# Altium PCB Controller_driver.PcbDoc
Units mil, origin at the board's own origin, x right, y up, seen from the top; angles counter-clockwise.
Board outline 1105 x 1800 mil, 2 copper layers (Top Layer, Bottom Layer); 55 components, 44 nets, 178 pads, 68 vias.
Unrouted connection lines stored in the file: 3.
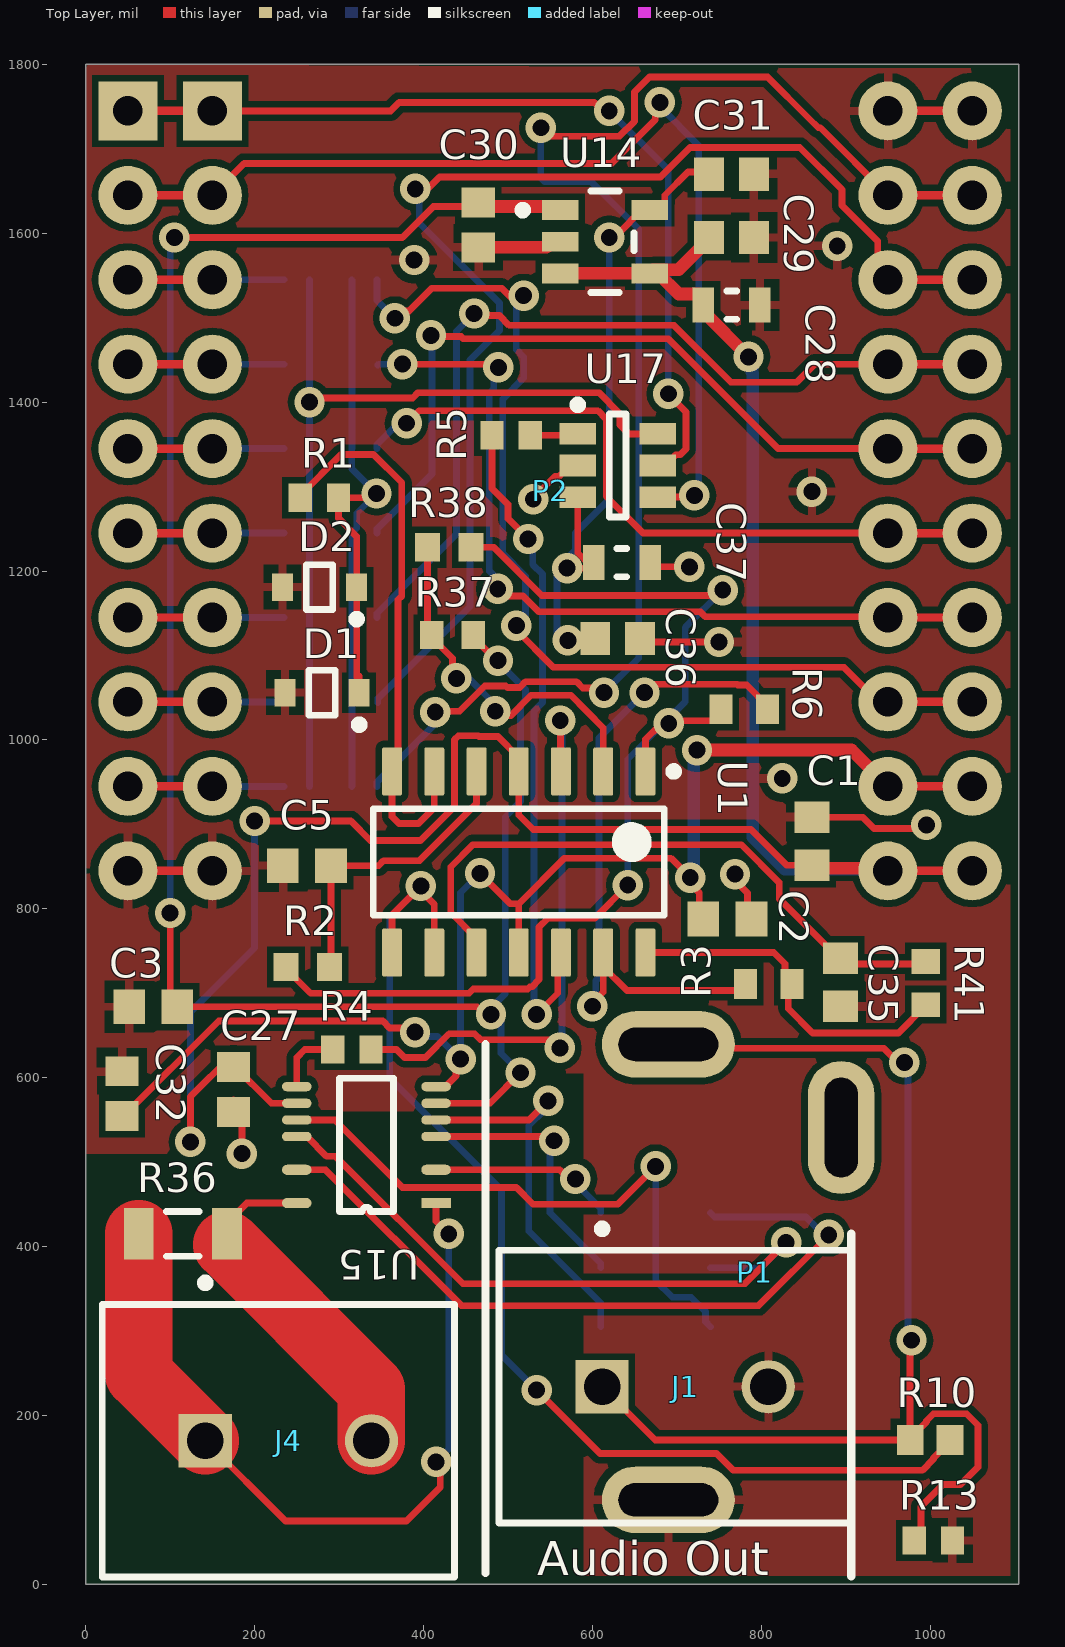
[diagram p0: Top Layer view]
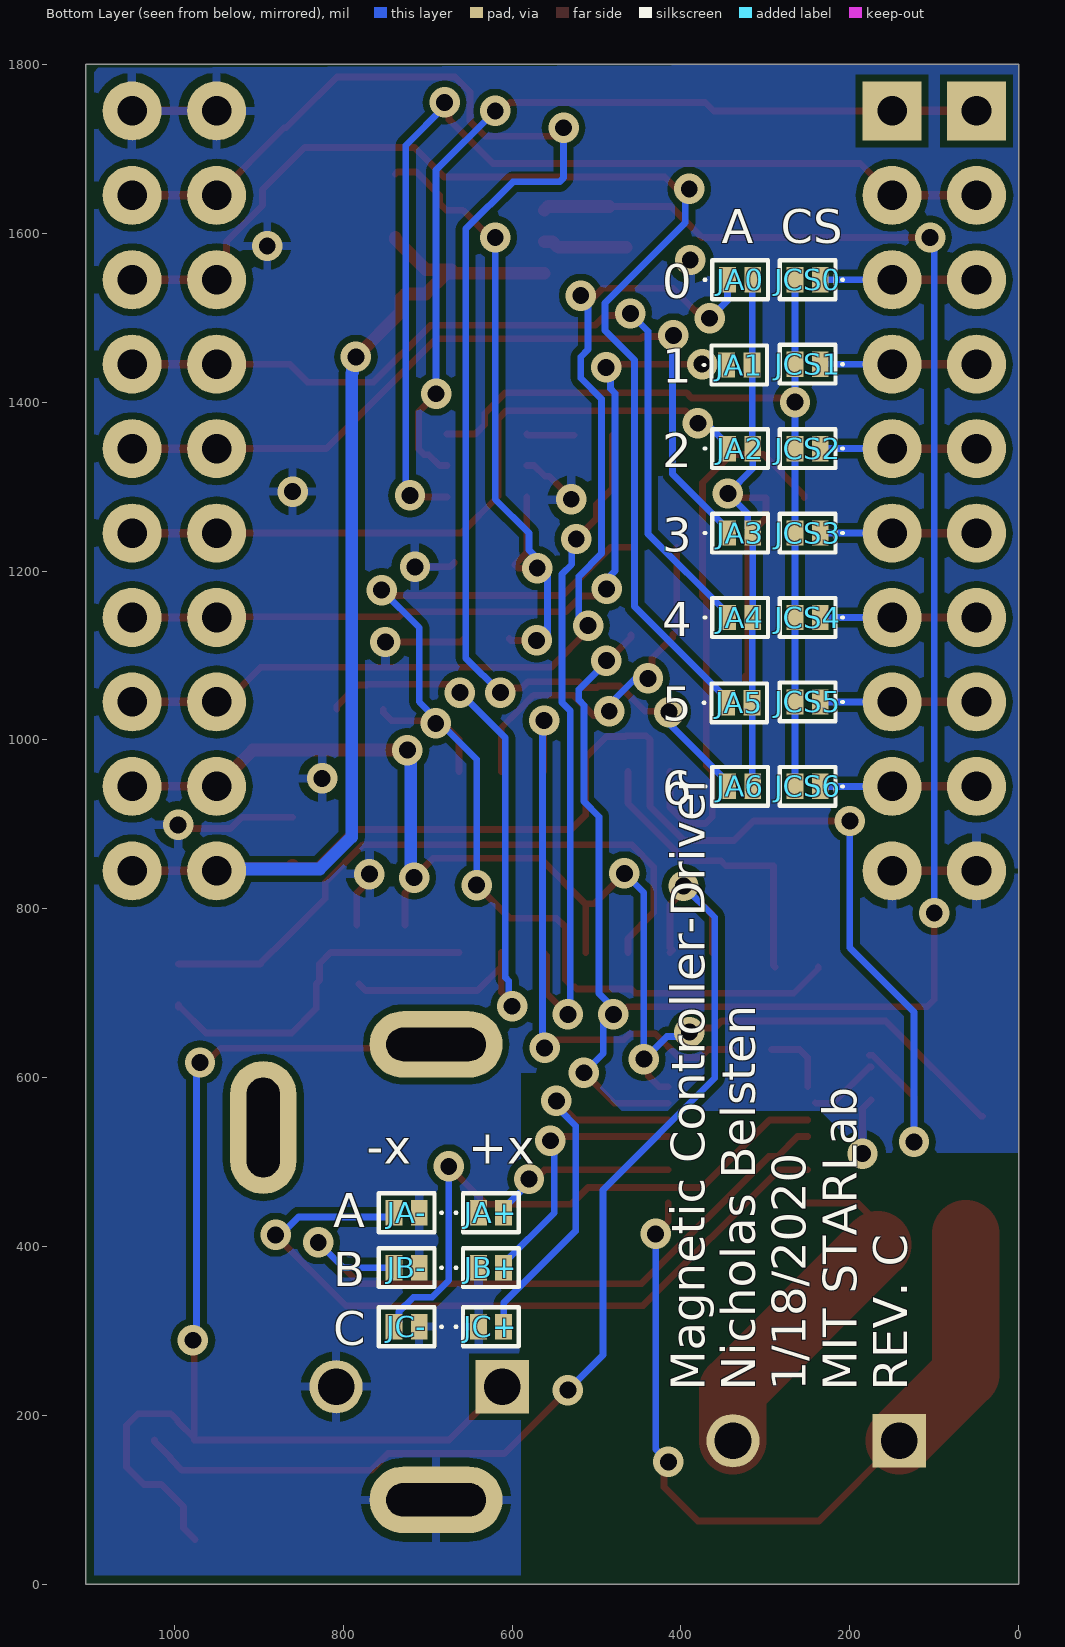
[diagram p1: Bottom Layer view, seen from below]

## Layer stack, top to bottom
Top Solder: solder mask 0.4, Solder Resist, Dk 3.5
Top Layer: signal copper 1.4
Dielectric 1: dielectric 12.6, FR-4, Dk 4.8
Bottom Layer: signal copper 1.4
Bottom Solder: solder mask 0.4, Solder Resist, Dk 3.5

## Board outline
0,0 1105,0 1105,1800 0,1800

## Design rules (kind name [scope] priority, off if disabled: settings)
Clearance [All] p1: gap=8 ignorepadtopadclearanceinfootprint=FALSE
ComponentClearance [All] p1: gap=0 collisioncheckmode=3 verticalgap=0 showdistances=FALSE
HoleSize [All] p1: absolutevalues=TRUE maxlimit=300 minlimit=10 maxpercent=80.000 minpercent=20.000
MinimumSolderMaskSliver [All] p1: minsoldermaskwidth=4
PolygonConnect [All] p1: connectstyle=Relief reliefconductorwidth=10 reliefentries=4 polygonreliefangle="90 Angle" airgapwidth=10
RoutingTopology [All] p1: topology=Daisy_Balanced
RoutingVias [All] p1: holewidth=20 width=36 viastyle="Through Hole" minholewidth=14 minwidth=30 maxholewidth=30 maxwidth=70
SilkToSilkClearance [All] p1: silktosilkclearance=5
SilkToSolderMaskClearance [IsPad] p1: minsilkscreentomaskgap=4 clearancetoexposedcopper=TRUE
SolderMaskExpansion [All] p1: expansion=3 istentingtop=FALSE
Width [All] p1: maxlimit=100 minlimit=8 preferedwidth=8
24 further rules are at their usual default settings.

## Components (designator, comment, footprint, x,y, rotation, side; value= is the part's Value field where it differs from the comment)
C1 "0.47 uF" CAPC1608X90X35ML10T15 860,880 r270 top
C2 "0.47 uF" CAPC1608X90X35ML10T15 760,788 r180 top
C3 "0.47 uF" CAPC1608X90X35ML10T15 80,684 r0 top
C5 "0.47 uF" CAPC1608X90X35ML10T15 262,851 r0 top
C27 "0.1 uF" CAPC1608X87X35NL15T15 175,586 r90 top
C28 "10 uF" CAPC1608X90X20ML10 765,1515 r180 top
C29 "0.1 uF" CAPC1608X87X35NL15T15 765,1595 r180 top
C30 "0.1 uF" CAPC1608X87X35NL15T15 465,1610 r90 top
C31 "0.1 uF" CAPC1608X87X35NL15T15 765,1670 r180 top
C32 "0.1 uF" CAPC1608X87X35NL15T15 43,581 r270 top
C35 "0.47 uF" CAPC1608X90X35ML10T15 894,713 r90 top
C36 "0.1 uF" CAPC1608X87X35NL15T15 630,1120 r180 top
C37 "10µF" CAPC1608X90X20ML10 635,1210 r180 top
D1 "BAT54HT1G" ONSC-SOD-323-2-477-02_V 280,1056 r180 top
D2 "MM3Z3V3T1G" ONSC-SOD-323-2-477-02_V 277,1181 r180 top
J1 "282836-2" TECO-282836-2_V 710,234 r0 top
J4 "282836-2" TECO-282836-2_V 240,170 r0 top
JA0 "*" solder_jumper 295,1545 r90 bottom
JA1 "*" solder_jumper 296,1444 r90 bottom
JA2 "*" solder_jumper 295,1345 r90 bottom
JA3 "*" solder_jumper 295,1245 r90 bottom
JA4 "*" solder_jumper 295,1145 r90 bottom
JA5 "*" solder_jumper 296,1044 r90 bottom
JA6 "*" solder_jumper 295,945 r90 bottom
JA+ "*" solder_jumper 590,440 r90 bottom
JA- "*" solder_jumper 760,440 r270 bottom
JB+ "*" solder_jumper 590,375 r90 bottom
JB- "*" solder_jumper 760,375 r270 bottom
JC+ "*" solder_jumper 590,305 r90 bottom
JC- "*" solder_jumper 760,305 r270 bottom
JCS0 "*" solder_jumper 285,1545 r270 bottom
JCS1 "*" solder_jumper 285,1445 r270 bottom
JCS2 "*" solder_jumper 285,1345 r270 bottom
JCS3 "*" solder_jumper 285,1245 r270 bottom
JCS4 "*" solder_jumper 285,1145 r270 bottom
JCS5 "*" solder_jumper 285,1045 r270 bottom
JCS6 "*" solder_jumper 285,945 r270 bottom
P1 "audio_jack" MJ-3536NG 690,100 r90 top
P2 "dp20" dp20-900-double 50,1745 r0 top
R1 "220" RESC1609X50X30LL10T20 276.76,1286.71 r0 top
R2 "10KOhm" RESC1609X55X30LL15T15 263,731 r0 top
R3 "100 kΩ" RESC1608X55X25NL10T15 809,711 r180 top
R4 "220" RESC1609X50X30LL10T20 315.32,633.45 r0 top
R5 "220" RESC1609X50X30LL10T20 503.94,1360.75 r180 top
R6 "100Ohm" RESC1608X55X25NL10T15 780.04,1036.32 r0 top
R10 "1 kΩ" RESC1608X55X30LL20T20 1000,171 r180 top
R13 "220" RESC1609X50X30LL10T20 1004,52 r180 top
R36 "0.01 Ω" RESC3216X70X50LL05T20 115,415 r180 top
R37 "1 kΩ" RESC1608X55X30LL15T15 434.48,1124.31 r0 top
R38 "10KOhm" RESC1609X55X30LL15T15 430.48,1228.31 r0 top
R41 "10KOhm" RESC1609X55X30LL15T15 995,712 r90 top
U1 "TLV274IDR" D0014A_N 512.86,855.42 r270 top
U14 "REF2033AIDDCR" FP-DDC0005A-MFG 615,1590 r0 top
U15 "LT6375" SOP16-12 415,451.5 r180 top
U17 "DAC121S101CIMK/NOPB" MK06A_N 630,1325 r0 top

## Footprints (in the part's own frame and the unit in brackets; to place one, negate y for a bottom-side part, rotate by r counter-clockwise, add the part's x,y. Pads: shape width x height; smd on the part's side, far side on the other; paste and mask are expansions set on the pad)
CAPC1608X87X35NL15T15 [mm] "Chip Capacitor, 2-Leads, Body 1.60x0.80mm, IPC Medium Density"
  rect 0.9x1 smd: 1(-0.675,0) 2(0.675,0)
  body extent -0.87,-0.48 0.87,0.47, height 0.87
CAPC1608X90X20ML10 [mm] "Chip Capacitor, 2-Leads, Body 1.70x0.90mm, IPC Low Density"
  rect 0.65x1.05 smd: 1(-0.85,0) 2(0.85,0)
  silkscreen extent -0.15,-0.43 0.15,0.43, body extent -0.85,-0.45 0.85,0.45, height 0.9
CAPC1608X90X35ML10T15 [mm] "Chip Capacitor, 2-Leads, Body 1.60x0.80mm, IPC Low Density"
  rect 0.95x1.05 smd: 1(-0.725,0) 2(0.725,0)
  body extent -0.85,-0.45 0.85,0.45, height 0.9
D0014A_N [mm] "SOIC, 14-Leads, Body 8.75x4mm, Pitch 1.27mm, IPC Medium Density"
  rrect17% 1.45x0.6 smd: 1(-2.725,3.81) 2(-2.725,2.54) 3(-2.725,1.27) 4(-2.725,0) 5(-2.725,-1.27) 6(-2.725,-2.54) 7(-2.725,-3.81) 8(2.725,-3.81) 9(2.725,-2.54) 10(2.725,-1.27) 11(2.725,0) 12(2.725,1.27) 13(2.725,2.54) 14(2.725,3.81)
  silkscreen extent -2.85,-4.38 1.6,4.79, body extent -3.02,-4.32 3.02,4.32, height 1.59
dp20-900-double [mil]
  rect 70x70 hole 35: 1(0,0) 1(100,0)
  round 70 hole 35: 2(0,-100) 2(100,-100) 3(0,-200) 3(100,-200) 4(0,-300) 4(100,-300) 5(0,-400) 5(100,-400) 6(0,-500) 6(100,-500) 7(0,-600) 7(100,-600) 8(0,-700) 8(100,-700) 9(0,-800) 9(100,-800) 10(0,-900) 10(100,-900) 11(900,-900) 11(1000,-900) 12(900,-800) 12(1000,-800) 13(900,-700) 13(1000,-700) 14(900,-600) 14(1000,-600) 15(900,-500) 15(1000,-500) 16(900,-400) 16(1000,-400) 17(900,-300) 17(1000,-300) 18(900,-200) 18(1000,-200) 19(900,-100) 19(1000,-100) 20(900,0) 20(1000,0)
  Top Layer lines w10: 0,-900 100,-900 ; 0,-800 100,-800 ; 0,-700 100,-700 ; 0,-600 100,-600 ; 0,-500 100,-500 ; 0,-400 100,-400 ; 0,-300 100,-300 ; 0,-200 100,-200 ; 0,-100 100,-100 ; 0,0 100,0 ; 900,-900 908,-900 1000,-900 ; 900,-800 1000,-800 ; 900,-700 1000,-700 ; 900,-600 1000,-600 ; 900,-500 1000,-500 ; 900,-400 1000,-400 ; 900,-300 1000,-300 ; 900,-200 1000,-200 ; 900,-100 1000,-100 ; 900,0 1000,0
FP-DDC0005A-MFG [mm]
  rect 1.1x0.6 smd paste+0 mask+0: 1(-1.35,0.95) 2(-1.35,0) 3(-1.35,-0.95) 4(1.35,-0.95) 5(1.35,0.95)
  silkscreen extent -2.6,-1.53 0.87,1.53, body extent -2,-1.63 2,1.63, height 0.25
MJ-3536NG [mm]
  oval 2x4 hole 1 slot 3 at 90 deg: 1(0,0) 2(13.7,0)
  oval 4x2 hole 1 slot 3 at 0 deg: 3(11.2,-5.2)
  silkscreen extent -2.3,-5.5 13.7,5.5
MK06A_N [mm] "SOT23, 6-Leads, Body 3.0x1.7mm, Pitch 0.95mm, Lead Span 2.9mm, IPC Medium Density"
  rect 1.1x0.65 smd: 1(-1.2,0.95) 2(-1.2,0) 3(-1.2,-0.95) 4(1.2,-0.95) 5(1.2,0) 6(1.2,0.95)
  silkscreen extent -1.32,-1.55 0.25,1.95, body extent -0.87,-1.53 0.87,1.54, height 1
ONSC-SOD-323-2-477-02_V [mm] "SOD, 2-Leads, Body 1.7x1.25mm"
  rect 0.63x0.83 smd: 1(-1.115,0) 2(1.115,0)
  silkscreen extent -1.24,-0.67 0.4,1.09, body extent -0.85,-0.63 0.85,0.63, height 1.06
RESC1608X55X25NL10T15 [mm] "Chip Resistor, 2-Leads, Body 1.60x0.80mm, IPC Medium Density"
  rect 0.7x0.9 smd: 1(-0.7,0) 2(0.7,0)
  body extent -0.85,-0.45 0.85,0.45, height 0.55
RESC1608X55X30LL15T15 [mm] "Chip Resistor, 2-Leads, Body 1.60x0.80mm, IPC High Density"
  rect 0.7x0.85 smd: 1(-0.625,0) 2(0.625,0)
  body extent -0.87,-0.48 0.87,0.48, height 0.55
RESC1608X55X30LL20T20 [mm] "Chip Resistor, 2-Leads, Body 1.60x0.80mm, IPC High Density"
  rect 0.8x0.9 smd: 1(-0.6,0) 2(0.6,0)
  body extent -0.9,-0.5 0.9,0.5, height 0.55
RESC1609X50X30LL10T20 [mm] "Chip Resistor, 2-Leads, Body 1.55x0.85mm, IPC High Density"
  rect 0.7x0.85 smd: 1(-0.575,0) 2(0.575,0)
  body extent -0.82,-0.48 0.82,0.48, height 0.5
RESC1609X55X30LL15T15 [mm] "Chip Resistor, 2-Leads, Body 1.75x0.95mm, IPC High Density"
  rect 0.75x0.85 smd: 1(-0.65,0) 2(0.65,0)
  body extent -0.87,-0.48 0.87,0.48, height 0.55
RESC3216X70X50LL05T20 [mm] "Chip Resistor, 2-Leads, Body 3.20x1.60mm, IPC High Density"
  rect 0.9x1.55 smd: 1(-1.325,0) 2(1.325,0)
  silkscreen extent -0.5,-0.67 0.5,0.67, body extent -1.63,-0.82 1.62,0.82, height 0.7
solder_jumper [mil]
  rect 30x20 smd: 0(0,20) 1(0,50)
  silkscreen extent -23,2 23,77
SOP16-12 [mil]
  rect 35x12 smd: 1(0,0)
  oval 35x12 smd: 3(0,-39.4) 14(165,-39.4) 16(165,0)
  oval 35x11 smd mask+2: 5(0,-78.8) 6(0,-98.5) 7(0,-118.2) 8(0,-137.9) 9(165,-137.9) 10(165,-118.2) 11(165,-98.5) 12(165,-78.8)
  silkscreen extent 50,-148 115,10
TECO-282836-2_V [mm] "Female Header, Pitch 5mm, 1 x 2 Position, Height 10mm"
  rect 1.6x1.6 hole 1.1: 1(-2.5,0)
  round 1.6 hole 1.1: 2(2.5,0)
  silkscreen extent -5.6,-4.1 5,4.87, body extent -5.6,-4.1 5,4.1, height 10

## Part data
C1 C2 C3 C5 C35: library part CMP-2006-02860-1, Manufacturer=Murata, Part Number=GRM188R71C474KA88D
C27 C29 C30 C31 C32 C36: library part CMP-2006-03300-1, Manufacturer=Kemet, Part Number=C0603X104K5RACTU, Capacitance="0.1 uF"
C28: library part CMP-2000-04979-1, "Chip Capacitor, 10 uF, +/- 10%, 10 V, -55 to 85 degC, 0603 (1608 Metric), RoHS, Tape and Reel", Capacitance=10µF, Manufacturer=TDK, Operating Temperature=-55degC~85degC, Package / Case=0603(1608Metric), Package Description="2-Pin Surface Mount Device, Body 1.6 x 0.8 mm", Package Reference=603, PCN Part Number=MLCCPartNumberChange30/Nov/2012, Ratings=-, Standard Package=1, Temperature Coefficient=X5R, Tolerance=±10%, Voltage - Rated=10V, Applications=GeneralPurpose, Category=Capacitors, Datasheet URL=http://download.siliconexpert.com/pdfs/2015/4/21/15/54/45/779/tdk_/manual/37024850441143360mlcc_commercial_general_en.pdf, Datasheet Version=Mar-15, Design Resources=20WNon-IsolatedBuckLEDDriverUsingPLLNK460KG, Family=CeramicCapacitors, Features=-, Height - Seated (Max)=-, Kits=445-9003-KIT-ND-KITCAPCERHICAPMLCCSMD, Lead Spacing=-, Lead Style=-, Manufacturer URL=http://www.tdk.com/, Mounting Type=SurfaceMount,MLCC, Online Catalog=CSeries,GeneralPurpose, Other Names=445-7486-1, Packaging=CutTape(CT), Product Training Modules=CSeriesGeneralApplicationsSEAT,CCV,andTVCLDesignToolsGuidetoReplacinganElectrolyticCapacitorwithanMLCC, RoHS Information=RoHSCertificate-MLCC, Series=C, Size / Dimension="0.063\"Lx0.031\"W(1.60mmx0.80mm)", Thickness (Max)="0.035\"(0.90mm)"
C37: library part CMP-2000-04979-1, "Chip Capacitor, 10 uF, +/- 10%, 10 V, -55 to 85 degC, 0603 (1608 Metric), RoHS, Tape and Reel", Manufacturer=TDK, Operating Temperature=-55degC~85degC, Package / Case=0603(1608Metric), Package Description="2-Pin Surface Mount Device, Body 1.6 x 0.8 mm", Package Reference=603, PCN Part Number=MLCCPartNumberChange30/Nov/2012, Ratings=-, Standard Package=1, Temperature Coefficient=X5R, Tolerance=±10%, Voltage - Rated=10V, Applications=GeneralPurpose, Capacitance=10µF, Category=Capacitors, Datasheet URL=http://download.siliconexpert.com/pdfs/2015/4/21/15/54/45/779/tdk_/manual/37024850441143360mlcc_commercial_general_en.pdf, Datasheet Version=Mar-15, Design Resources=20WNon-IsolatedBuckLEDDriverUsingPLLNK460KG, Family=CeramicCapacitors, Features=-, Height - Seated (Max)=-, Kits=445-9003-KIT-ND-KITCAPCERHICAPMLCCSMD, Lead Spacing=-, Lead Style=-, Manufacturer URL=http://www.tdk.com/, Mounting Type=SurfaceMount,MLCC, Online Catalog=CSeries,GeneralPurpose, Other Names=445-7486-1, Packaging=CutTape(CT), Product Training Modules=CSeriesGeneralApplicationsSEAT,CCV,andTVCLDesignToolsGuidetoReplacinganElectrolyticCapacitorwithanMLCC, RoHS Information=RoHSCertificate-MLCC, Series=C, Size / Dimension="0.063\"Lx0.031\"W(1.60mmx0.80mm)", Thickness (Max)="0.035\"(0.90mm)"
D1: library part CMP-1055-00462-1, "Schottky Barrier Diode, 2-Pin SOD-323, Pb-Free, Tape and Reel", Manufacturer="On Semiconductor", ComponentLink1Description="Manufacturer URL", ComponentLink1URL=http://www.onsemi.com/, ComponentLink2Description=Datasheet, ComponentLink2URL=http://www.onsemi.cn/pub_link/Collateral/BAT54HT1-D.PDF, ComponentLink3Description="Package Specification", ComponentLink3URL=http://www.onsemi.com/pub_link/Collateral/477-02.PDF.1, Configuration=Single, DatasheetVersion="Rev. 6", IFSM Max (A)=0.6, Mounting Technology="Surface Mount", PackageDescription="2-Pin SOD, Body 1.7 x 1.25 mm", PackageReference=SOD-323-2-477-02, PackageVersion="Rev. H, 03/2007", Packing="Tape and Reel", PartNumber=BAT54HT1G, RoHS=TRUE, trr Max (ns)=5
D2: library part CMP-1060-00672-1, "Zener Voltage Regulator, 300 mW, 2-Pin SOD-323, Pb-Free, Tape and Reel", Manufacturer="On Semiconductor", ComponentLink1Description="Manufacturer URL", ComponentLink1URL=http://www.onsemi.com/, ComponentLink2Description=Datasheet, ComponentLink2URL=http://www.onsemi.cn/pub_link/Collateral/MM3Z2V4T1-D.PDF, ComponentLink3Description="Package Specification", ComponentLink3URL=http://www.onsemi.com/pub_link/Collateral/477-02.PDF.1, DatasheetVersion="Rev. 9", Mounting Technology="Surface Mount", P Max (W)=0.3, PackageDescription="2-Pin SOD, Body 1.7 x 1.25 mm", PackageReference=SOD-323-2-477-02, PackageVersion="Rev. H, 03/2007", Packing="Tape and Reel", PartNumber=MM3Z3V3T1G, RoHS=Pb-Free, VZ Typ (V)=3.3
J1 J4: library part CMP-1684-00017-1, "Female Header, Pitch 5 mm, 1 x 2 Position, Height 10 mm, Tail Length 3.5 mm, Rohs, Bulk", Color=Green, Current=13.5A, Manufacturer="TE Connectivity", Package Description="Female Header, Pitch 5 mm, 1 x 2 Position, Height 10 mm, Tail Length 3.5 mm", Package Reference=THD, Standard Package=300, Voltage=300V, 3D Model=282836-2.pdf, Category=Connectors,Interconnects, Clamp Material - Plating=Brass-NickelPlated, Contact Material - Plating=Brass-TinPlated, Datasheet URL=http://www.te.com.cn/commerce/DocumentDelivery/DDEController?Action=showdoc&DocId=Catalog+Section%7F1308389_EUROSTYLE_TERMINAL_BLOCKS%7F0607%7Fpdf%7FEnglish%7FENG_CS_1308389_EUROSTYLE_TERMINAL_BLOCKS_0607.pdf%7F282836-2, Dynamic Catalog=BuchananSeries, Family=TerminalBlocks-WiretoBoard, Featured Product=EurostyleTerminalBlockConnectors, Features=Interlocking(Side), Housing Material=Polyamide(PA66),Nylon6/6, Manufacturer URL=http://www.te.com, Mating Orientation=HorizontalwithBoard, Mounting Type=ThroughHole, Number of Levels=1, Other Names="5ULV-02B / A98076", Packaging=Bulk, Pitch="0.197\"(5.00mm)", Positions Per Level=2, Product Training Modules=Wire-to-BoardEurostyleTerminalBlocks, RoHS Information=282836-2StatementofCompliance, Screw Material - Plating=Brass-NickelPlated, Screw Thread=M3, Series=Buchanan, Torque - Screw=0.68Nm(6Lb-In), Wire Gauge=16-30AWG, Wire Termination=Screw-RisingCageClamp
JA0 JA1 JA2 JA3 JA4 JA5 JA6 JA+ JA- JB+ JB- JC+ JC- JCS0 JCS1 JCS2 JCS3 JCS4 JCS5 JCS6: library part solder_jumper
R1 R4 R5 R13: library part CMP-2000-03085-1, Manufacturer="Vishay Dale", Part Number=CRCW0603220RFKEA, Resistance=220
R2 R38 R41: library part CMP-2000-07452-1, "Chip Resistor, 10 KOhm, +/- 1%, 0.1 W, -55 to 155 degC, 0603 (1608 Metric), RoHS, Tape and Reel", Case Code (Imperial)=0603, Case Code (Metric)=1608, Manufacturer=Panasonic, Max Operating Temperature=155degC, Max Power Dissipation=100mW, Min Operating Temperature=-55degC, Package Description="2-Pin Surface Mount Device, Body 1.6 x 0.85 mm", Package Quantity=1, Package Reference=603, Temperature Coefficient=100ppm\/degreesC, Tolerance=1%, Voltage Rating=75V, Case\/Package=0603, Composition=ThickFilm, Contact Plating=Tin, Datasheet URL=https://industrial.panasonic.com/cdbs/www-data/pdf/RDA0000/AOA0000C304.pdf, Datasheet Version=02/2017, Depth=0.8mm, Height=0.45mm, Lead Free=LeadFree, Length=1.6mm, Manufacturer URL=http://www.panasonic.com/, Military Standard=Not, Mount=SurfaceMount, Mounting Technology=SurfaceMount, Number of Pins=2, Number of Terminations=2, Packaging=TapeandReel, Power Rating=100mW, Radiation Hardening=No, REACH SVHC=NoSVHC, Resistance=10KOhm, RoHSCompliant=true, Termination=SMD/SMT, Voltage Rating (DC)=75V, Width=0.031inch
R3: library part CMP-2000-04301-1, Manufacturer=Yageo, Part Number=RC0603JR-10100KL, Resistance="100 kΩ"
R6: library part CMP-2100-03663-1, "Chip Resistor, 100 Ohm, +/- 1%, 0.1 W, -55 to 155 degC, 0603 (1608 Metric), RoHS, Tape and Reel", Case Code (Imperial)=0603, Case Code (Metric)=1608, Manufacturer=Yageo, Max Operating Temperature=155degC, Min Operating Temperature=-55degC, Package Description="2-Pin Surface Mount Device, Body 1.6 x 0.8 mm", Power Rating=100mW, Temperature Coefficient=100ppm/degreesC, Tolerance=1%, Voltage Rating=50V, Case/Package=0603, Composition=ThickFilm, Datasheet URL=http://www.yageo.com/NewPortal/yageodocoutput?fileName=/pdf/R-Chip/PYu-RC_Group_51_RoHS_L_5.pdf, Datasheet Version="Rev. 5, 10/2016", Depth=0.8mm, Height=0.45mm, Lead Free=LeadFree, Length=1.6mm, Manufacturer URL=http://www.yageo.com/, Military Standard=Not, Number of Pins=2, Package Reference=0603, Packaging=TapeandReel, REACH SVHC=Unknown, Resistance=100Ohm, RoHSCompliant=true, Termination=SMD/SMT, Voltage Rating (DC)=50V, Width=0.8mm
R10: library part CMP-2000-00873-1, Manufacturer=Panasonic, Part Number=ERA3AEB102V, Resistance="1 kΩ"
R36: library part CMP-2003-00764-1, Manufacturer=Panasonic, Part Number=ERJ8BWFR010V, Resistance="0.01 Ω"
R37: library part CMP-2000-00180-1, Manufacturer=Panasonic, Part Number=ERJ-3EKF1001V, Resistance="1 kΩ"
U1: library part CMP-0272-02760-3, "550 uA/Ch, 3 MHz, Rail-to-Rail Output Operational Amplifier, 2.7 to 16 V, -40 to 125 degC, 14-pin SOIC (D14), Green (RoHS & no Sb/Br)", Manufacturer="Texas Instruments", Rating=Catalog, Total Supply Voltage(Max)(+5V is 5, +/-5V is 10)=16, Total Supply Voltage(Min)(+5V is 5, +/-5V is 10)=2.7, CMRR(Min)(dB)=69, Code_JEDEC=MS-012, ComponentLink1Description="Manufacturer URL", ComponentLink1URL=http://www.ti.com/, ComponentLink2Description=Datasheet, ComponentLink2URL=http://www.ti.com/lit/ds/symlink/tlv274.pdf, ComponentLink3Description="Package Specification", ComponentLink3URL=http://www.ti.com/lit/ml/mpds177g/mpds177g.pdf, DatasheetVersion=SLOS351D, Eco-Plan="Green (RoHS & no Sb/Br)", GBW(Typ)(MHz)=3, IIB(Max)(pA)=60, Iq per channel(Max)(mA)=0.55, Mounting Technology="Surface Mount", Number of Channels=4, Offset Drift(Typ)(uV/C)=2, PackageDescription="14-Pin Plastic Small Outline, Body 8.65 x 3.9 mm, Pitch 1.27 mm", PackageReference=D0014A, PackageVersion="4040047-5/M, 06/2011", Packing="LARGE T&R", PartNumber=TLV274IDR, Slew Rate(Typ)(V/us)=2.4, Sub Family="Low Supply Voltage Amplifier (<=2.7V), Precision Amplifier", Vio (25C)(Max)(mV)=5
U14: library part CMP-04916-000008-1, "IC VREF SERIES 1.65V/3.3V 5SOT", Manufacturer="Texas Instruments", Max Junction Temp=+150°C, Max Supply Voltage=5.5V, Min Supply Voltage=3.32V, Nominal Supply Current=360uA, Output Current=20mA, Output Voltage=1.65/3.3V, Package=DDC0005A, Temperature="-40°C to +125°C", Temperature Range High=+125°C, Temperature Range Low=-40°C, Automotive=No, Category=IC, ComponentLink2Description=Datasheet, ComponentLink2URL=http://www.ti.com/lit/ds/symlink/ref2033.pdf, Device Class L1="Integrated Circuits (ICs)", Device Class L2="Power Management ICs", Device Class L3="Voltage References", Digikey Description="IC VREF SERIES 1.65V/3.3V 5SOT", Height=1.1mm, Lead Free=Yes, Manufacturer Part Number=REF2033AIDDCR, Number Of Outputs=2, Octopart=https://octopart.com/ref2033aiddcr-texas+instruments-46921199, Output Type=Fixed, Reference Type=Series, RoHS=TRUE, Standoff Height=0mm
U17: library part CMP-0061-00064-2, "12-Bit Micro Power, RRO Digital-to-Analog Converter, 6-pin Tiny SOT23, Pb-Free", Manufacturer="National Semiconductor", PackageTopMarking=X61C*XTT, PowerWise=Y, Code_IPC=SOT26A-6, Code_JEDEC=MO-193-AA, ComponentLink1Description="DAC121S101 Datasheet", ComponentLink1URL=http://www.national.com/ds/DA/DAC121S101.pdf, ComponentLink2Description="DAC121S101 Web Page", ComponentLink2URL=http://www.national.com/pf/DA/DAC121S101.html, ComponentLink3Description="MK06A Package Page", ComponentLink3URL=http://www.national.com/packaging/folders/mk06a.html, CompType="D/A Converter", DatasheetVersion=Feb-2010, PackageDescription="Molded TSOT, 2.97 x 1.65 x 0.87mm Body, 6 Lead, 0.95mm Pitch", PackageReference=MK06A, PackageVersion="revE, Nov-2008", PinCount=6, RevisionNote="Component URLs added", RoHS=Y

## Via types
v1: diameter 36, hole 20, Top Layer to Bottom Layer, 68 vias

## Nets (pads, with @x,y where several pads share a name; then routed paths per layer and width w, separated by ;. In a path a pad name is that pad's centre, name@x,y a point inside that pad or via, vN(x,y) a via of type N, cw(c..) or ccw(c..) an arc to the next point about the centre after c; other vN are vias at no path point)
5V: C1.2 C27.2 C28.2 C29.2 P2.11 U1.4 U14.3 U14.4 U15.10 | length 2703.5
  Top Layer w8: v1(124,524) 124,577.54 173.03,626.57 C27.2@176.97,626.57 ; C27.2 176.97,612.57 219.84,569.7 240.33,569.7 U15.10@240.9,570.27 ; v1(200,904) 314,904 337,881 396.63,881 436.67,921.04 436.67,1000.31 441.35,1005 464.68,1005 465.68,1004 488.29,1004 512.86,979.44 U1.4 512.86,911.14 530,894 788,894 830.54,851.46 C1.2
  Top Layer w15: U14.3 U14.4 ; C29.2 738.43,1593.03 702.3,1556.91 672.46,1556.91 U14.4 ; v1(785,1453.66) 731.54,1507.13 C28.2 731.54,1522.87 726.24,1528.17 702.42,1528.17 677.99,1552.6 U14.4 ; C1.2 863.23,848.23 954.77,848.23 P2.11@958,845
  Bottom Layer w8: v1(124,524) 124,677.79 200,753.79 v1(200,904)
  Bottom Layer w15: v1(785,1453.66) 789.02,1449.64 789.02,1435.36 790,1434.37 790,885 827.89,847.11 947.89,847.11 P2.11@950,845
+REFA: JA+.0 U15.3 | length 221.9
  Top Layer w8: U15.3 561.52,490.9 572.42,480 v1(580,480)
  Bottom Layer w8: v1(580,480) 580,475 610,445 JA+.0
+REFB: JB+.0 U15.5 | length 321.8
  Top Layer w8: U15.5 554.7,530.3 v1(554.7,525.3)
  Bottom Layer w8: v1(554.7,525.3) 550,520.6 550,440 610,380 JB+.0
+REFC: JC+.0 U15.6 | length 440.3
  Top Layer w8: U15.6 525,550 v1@542.6,567.6
  Bottom Layer w8: v1@542.6,567.6 542.6,560.99 524.7,543.08 524.7,418.33 610,333.03 JC+.0
  other v1: 547.6,572.6
-5V: C2.2 C32.2 P2.12 U1.11 U15.8 | length 1559.5
  Top Layer w8: C32.2 44.97,554.43 157.54,667 351.89,667 360,658.89 385.11,658.89 v1(390,654) ; U15.8 426.19,589.4 438.64,601.85 438.64,616.64 v1(444,622) ; v1(467,842) 503.14,805.86 512.86,805.86 ; U1.11 512.86,805.86 ; C2.2@726.76,780.7 726.76,818.67 716,829.42 v1(716,837) 693,860 567,860 512.86,805.86
  Top Layer w15: v1(724,988) 907,988 P2.12@950,945
  Bottom Layer w8: v1(390,654) 395.36,648.64 416.73,648.64 443.37,622 v1(444,622) 444,819 v1(467,842)
  Bottom Layer w15: v1(716,837) 720,841 720,984 v1(724,988)
-REFA: JA-.0 U15.14 | length 882.7
  Top Layer w8: U15.14 284.1,490.9 445,330 797,330 880,413 v1(880,413.9)
  Bottom Layer w8: JA-.0 745,435 853.02,435 874.12,413.9 v1(880,413.9)
-REFB: JB-.0 U15.12 | length 774.6
  Top Layer w8: U15.12 262,530.3 285.4,506.9 295.67,506.9 446.57,356 781,356 829.57,404.57 v1(829.57,405)
  Bottom Layer w8: JB-.0 800,375 829.57,404.57 v1(829.57,405)
-REFC: JC-.0 U15.11 | length 714.9
  Top Layer w8: U15.11 295,550 375,470 510,470 530,450 630,450 v1(675,495)
  Bottom Layer w8: v1(675,495) 675,360 695,340 716.97,340 734,322.97 734,311 JC-.0
A_0: JA0.1 P2.13 | length 1127.3
  Top Layer w8: v1@376.14,1508.43 376.48,1508.1 383.1,1508.1 410,1535 492.42,1535 502.42,1525 517.54,1525 v1(518.7,1526.16) ; v1@508.35,1132.96 508.35,1131.65 554,1086 898,1086 939,1045 P2.13@950,1045
  Bottom Layer w8: JA0.1 345,1520.58 v1(366.14,1499.43) ; v1@507,1134.3 507.96,1135.26 520,1135.26 520,1142.58 521,1143.58 521,1193.74 494,1220.74 494,1404 518.71,1428.71 518.71,1453.71 510,1462.43 510,1521.48 514.01,1521.48 v1(518.7,1526.16)
  other v1: 510,1135.3
A_1: JA1.1 P2.14 | length 893.5
  Top Layer w8: v1(375,1445) 485,1445 v1(488.71,1441.29) ; v1@491,1175.91 496.36,1170.55 517.97,1170.55 536.83,1151.69 728,1151.69 733.69,1146 949,1146 P2.14@950,1145
  Bottom Layer w8: JA1.1 347,1445 v1(375,1445) ; v1(488.71,1441.29) 483.36,1435.93 483.36,1415.98 478,1410.63 478,1199.92 493.19,1184.73 491,1182.53 v1@491,1175.91
  other v1: 488,1178.91
A_2: JA2.1 P2.15 | length 740.3
  Top Layer w8: v1(380,1375) 395,1390 606.58,1390 616.41,1380.17 616.41,1288.59 660,1245 P2.15@950,1245
  Bottom Layer w8: JA2.1 345,1350 364.64,1369.64 374.64,1369.64 v1(380,1375)
A_3: JA3.1 P2.16 | length 858.1
  Top Layer w8: v1(409,1479.17) 410.36,1477.81 444.76,1477.81 447.57,1475 690,1475 820,1345 P2.16@950,1345
  Bottom Layer w8: JA3.1 345,1250 410,1315 410,1478.17 v1(409,1479.17)
A_4: JA4.1 P2.17 | length 940.2
  Top Layer w8: v1(460,1505) 462.43,1502.57 490,1502.57 501.57,1491 696.63,1491 763.97,1423.66 842.23,1423.66 863.57,1445 P2.17@950,1445
  Bottom Layer w8: JA4.1 345,1150 439,1244 439,1484 v1(460,1505)
A_5: JA5.1 P2.18 | length 1387.5
  Top Layer w8: v1(390.24,1652.67) 392.33,1652.67 395,1650 402.58,1650 419.25,1666.67 680.72,1666.67 715.74,1701.69 845.69,1701.69 895.73,1651.65 895.73,1632.81 938.14,1590.4 938.14,1556.86 P2.18@950,1545
  Bottom Layer w8: JA5.1 346,1049 455,1158 455,1450 490,1485 490,1517.43 395,1612.43 395,1647.92 v1(390.24,1652.67)
A_6: JA6.1 P2.19 | length 1627.4
  Top Layer w8: v1@415,1034 442.57,1034 472.57,1064 497.43,1064 499.43,1062 514.09,1062 521.09,1069 581.05,1069 588.7,1061.36 608.5,1061.36 v1(613.85,1056) ; v1(539,1725) 549,1715 632.43,1715 650,1732.57 650,1767.43 667.57,1785 807.63,1785 856.31,1736.31 867.63,1725 870,1725 P2.19@950,1645
  Bottom Layer w8: JA6.1 345,950 415,1020 v1@415,1034 ; v1(539,1725) 539,1665.69 543.69,1661 599,1661 655,1605 655,1097.15 v1(613.85,1056)
  other v1: 414,1033
CS_0: JCS0.1 P2.3 | length 85
  Bottom Layer w8: P2.3@150,1545 JCS0.1
CS_1: JCS1.1 P2.4 | length 85
  Bottom Layer w8: P2.4@150,1445 JCS1.1
CS_2: JCS2.1 P2.5 | length 85
  Bottom Layer w8: P2.5@150,1345 JCS2.1
CS_3: JCS3.1 P2.6 | length 85
  Bottom Layer w8: P2.6@150,1245 JCS3.1
CS_4: JCS4.1 P2.7 | length 85
  Bottom Layer w8: P2.7@150,1145 JCS4.1
CS_5: JCS5.1 P2.8 | length 85
  Bottom Layer w8: P2.8@150,1045 JCS5.1
CS_6: JCS6.1 P2.9 | length 85
  Bottom Layer w8: P2.9@150,945 JCS6.1
CSb: JCS0.0 JCS1.0 JCS2.0 JCS3.0 JCS4.0 JCS5.0 JCS6.0 U17.6 | length 1044.9
  Top Layer w8: v1(265,1400) 270,1405 387.37,1405 393.66,1411.29 607.92,1411.29 632.41,1386.79 632.41,1373.58 643.59,1362.4 U17.6
  Bottom Layer w8: JCS6.0 JCS5.0 JCS4.0 JCS3.0 JCS2.0 v1(265,1400) JCS1.0 JCS0.0
GND: C1.1 C2.1 C3.1 C5.1 C27.1 C28.1 C29.1 C30.1 C31.1 C32.1 C35.1 C36.1 C37.1 D1.2 D2.2 J1.2 JA+.1 JA-.1 JB+.1 JB-.1 JC+.1 JC-.1 P1.1 P2.10 P2.20 R13.1 U14.2 U17.2 | length 607.8
  Top Layer w8: C27.1@175,573.43 186,562.43 185,561.43 v1(185,510) ; v1@540,1285 535,1285 535,1291.26 556.13,1312.39 561.29,1312.39 573.9,1325 U17.2 ; C36.1 660.57,1116 744,1116 745,1115 749,1115 v1(750,1116) ; C37.1 673.46,1205 v1(715,1205) v1@715,1215 ; v1(769,841) 769,833.42 783.84,818.58 C2.1@783.84,780.7 ; C1.1 919.99,908.54 933.53,895 991.11,895 v1(995.55,899.45) ; v1(860,1294.16) v1@861.03,1293.14 ; v1@890.02,1583.57 v1(890.02,1584.98)
  Top Layer w15: C30.1 545.43,1583.43 552.01,1590 U14.2
  other v1: 825,954.5 530,1285 388.96,1568.45
NetC5_2: C5.2 R2.2 U1.5 | length 361.7
  Top Layer w8: R2.2 290.54,732.95 C5.2 346.93,851 352.93,857 395.25,857 462.86,924.6 U1.5
NetC35_2: C35.2 R41.2 U1.10 | length 758
  Top Layer w8: U1.10 462.86,764.87 432.31,795.41 432.31,849.74 458.57,876 776.43,876 821.29,831.13 821.29,812.28 866.73,766.84 897.95,735.62 897.95,734.59 R41.2@995,734.59
NetR1_1: R1.1 U1.6 U1.7 | length 661.4
  Top Layer w8: R1.1 254.12,1289.67 302.45,1338 341,1338 374.44,1304.56 374.44,1170.5 370,1166.06 370,969.85 U1.7 362.86,909.14 371,901 394,901 412.86,919.86 U1.6
NetR2_1: R2.1 R6.1 R38.2 U1.1 | length 1378.5
  Top Layer w8: R2.1 237.41,729.03 266.44,700 454,700 459,705 523.41,705 526,707.59 528.46,707.59 537,716.13 537,778.43 547.25,788.68 602.68,788.68 v1(642,828) ; R38.2 482.84,1228.31 540.1,1171.05 746.81,1171.05 751.5,1175.74 v1@751.5,1179.5 ; U1.1 662.86,1000.8 679.33,1017.27 682.22,1017.27 682.47,1017.52 681.49,1020.02 686.44,1015.59 v1(690.46,1019.61) ; v1@690.46,1022.8 742.7,1022.8 752.48,1032.58 R6.1
  Bottom Layer w8: v1(642,828) 642,977.15 710,1045.15 710,1133 v1(754.5,1177.5)
NetR3_1: R3.1 R41.1 U1.14 | length 415.8
  Top Layer w8: U1.14 814.86,748.14 828.05,734.95 828.05,714.95 832,711 832,682 861,653 962.62,653 993.03,683.41 995,683.41 R41.1
NetR3_2: R3.2 R6.2 U1.13 | length 805
  Top Layer w8: v1(600.05,684.57) 600.05,688.36 612.86,701.16 U1.13@612.86,731.4 ; U1.13 U1.13@612.86,731.4 ; v1@666.54,1066.04 771.23,1066.04 772.27,1065 782.86,1065 807.6,1040.26 R6.2 ; R3.2 773.7,703.26 641,703.26 U1.13@612.86,731.4
  Bottom Layer w8: v1(600.05,684.57) 604,688.52 604,714.57 608,718.57 608,1002.15 v1(661.85,1056)
NetR4_1: R4.1 U15.9 | length 81.2
  Top Layer w8: U15.9 250,624 259.45,633.45 R4.1
NetR5_1: R5.1 U17.1 | length 56.9
  Top Layer w8: R5.1 581.11,1360.75 U17.1
NetR10_1: R10.1 U1.8 U1.9 | length 1402
  Top Layer w8: U1.8 362.86,792.86 v1@390.69,820.69 ; v1(397,827) 397,821 412.86,805.14 412.86,753.85 410,750.99 U1.9 ; v1(534,230.04) 609.03,155 747.02,155 767.02,135 990.81,135 1004.13,148.31 1004.13,149.54 1023.62,169.03 R10.1
  Bottom Layer w8: v1(397,827) 360,790 360,599.43 492.32,467.11 492.32,271.71 v1(534,230.04)
NetR37_1: R37.1 R38.1 U1.2 | length 446.3
  Top Layer w8: R38.1 404.89,1129.29 R37.1 409.88,1121.35 434.46,1096.77 434.46,1077.54 v1(439.07,1072.93) ; v1(485,1034) 490,1029 503.71,1029 527.71,1053 574.43,1053 593.64,1033.79 593.64,1033.67 612.86,1014.46 U1.2
  Bottom Layer w8: v1(439.07,1072.93) 440,1072 454.71,1072 488.04,1038.67 485,1035.63 v1(485,1034)
out: J1.1 P1.2 R10.2 R13.2 | length 1459.4
  Top Layer w8: J1.1 674.57,171 R10.2 R10.2@976.38,172.97 ; P1.2 694.37,635 945.06,635 962.06,618 v1(969.63,618) ; R13.2@975.46,53 989.17,66.72 989.17,92.17 1015.09,118.09 1036.09,118.09 1056.69,138.69 1056.69,188.37 1043.06,202 1004.19,202 995.87,193.69 995.87,192.46 R10.2@976.38,172.97 ; v1(978,289) 976.38,287.38 R10.2@976.38,172.97
  Bottom Layer w8: P1.2 692.69,639.37 P1.2@725.37,606.69 ; v1(969.63,618) 973.82,613.82 973.82,293.18 v1(978,289)
s_N: J4.2 R36.1 U15.16 | length 421.4
  Top Layer w8: R36.1 167.17,427.8 190.87,451.5 U15.16
  Top Layer w15: R36.1@167.17,402.2 R36.1
  Top Layer w80: R36.1@167.17,402.2 338.43,230.94 J4.2
s_P: J4.1 R36.2 U15.1 | length 963
  Top Layer w8: J4.1 236.57,75 380,75 420,115 420,140 v1(415,145) ; U15.1 415,430 v1(430,415)
  Top Layer w80: R36.2 62.83,248.74 J4.1
  Bottom Layer w8: v1(415,145) 430,160 v1(430,415)
sense: R4.2 U1.3 | length 693.6
  Top Layer w8: R4.2 368.12,633.45 377.57,624 402.43,624 430.43,652 460.57,652 467.57,645 554,645 554,642.75 v1@559.52,637.23 ; v1(562,1023) 562.43,1022.57 562.43,963.13 U1.3
  Bottom Layer w8: v1@559.52,637.23 564.03,641.74 564.03,1020.97 v1(562,1023)
  other v1: 561.52,635.23
Sense_amp: D1.1 D2.1 JA0.0 JA1.0 JA2.0 JA3.0 JA4.0 JA5.0 JA6.0 R1.2 | length 901.4
  Top Layer w8: 323.65,1075.65 323.65,1071.71 320.9,1074.47 D2.1 320.9,1241.1 299.39,1262.61 R1.2 339.25,1286.71 v1(344.44,1291.9)
  Bottom Layer w8: JA6.0 315.5,945.5 315.5,1144.5 JA4.0 JA3.0 321,1251 321,1268.47 v1(344.44,1291.9) 315,1321.34 JA2.0 315.5,1345.5 315.5,1544.5 JA0.0
set: R5.2 U1.12 | length 801
  Top Layer w8: R5.2 481.31,1297.69 500,1279 500,1262 v1(524,1238) ; v1(534.03,675) 559.05,700.02 559.05,744.33 U1.12
  Bottom Layer w8: v1(524,1238) 529.36,1232.64 529.36,1208.01 541,1196.37 541,1044.43 531,1034.43 531,678.03 v1(534.03,675)
SPI_MOSI: P2.2 U17.4 | length 1118.3
  Top Layer w8: P2.2@150,1645 187.67,1682.67 622.73,1682.67 674.64,1734.59 674.64,1749.64 v1(680,1755) ; U17.4 723.91,1287.6 v1@725.94,1289.63
  Bottom Layer w8: v1(680,1755) 680,1750 725.94,1704.06 v1@725.94,1289.63
  other v1: 720.94,1289.63
SPI_SCLK: P2.1 U17.5 | length 958.1
  Top Layer w8: P2.1@150,1745 361.21,1745 371.21,1755 602.42,1755 612.42,1745 v1(620,1745) ; U17.5 686.1,1325 698.71,1337.61 703.87,1337.61 710.9,1344.64 710.9,1388.47 690,1409.37 v1(690,1410)
  Bottom Layer w8: v1(620,1745) 690,1675 v1(690,1410)
VBIAS: C3.2 C30.2 R37.2 U14.1 U15.7 | length 2463.5
  Top Layer w8: v1@100.17,795.17 v1(100,795) 100,692.54 C3.2 463.42,684 472.42,675 v1(480,675) ; v1(105,1595) 375,1595 411.71,1631.71 485,1631.71 ; U15.7 478.8,569.7 v1(515,605.9) ; R37.2 459.09,1121.35 486.45,1094 v1(488.35,1094)
  Top Layer w15: 485,1631.71 557.54,1631.71 U14.1
  Bottom Layer w8: v1(100,795) 100,1590.31 104.69,1595 v1(105,1595) ; v1(480,675) 483,672 492,672 492,628.9 v1(515,605.9) ; v1(488.35,1094) 489.35,1093 489.35,1091.35 521,1059.7 521,1047.05 515,1041.05 515,927 497,909 497,699.58 485.36,687.93 485.36,681.64 v1@492,675
VREF: C31.2 C36.2 C37.2 U14.5 U17.3 | length 827.1
  Top Layer w8: v1(570.17,1203.4) 592.74,1203.4 596.54,1207.19 596.54,1207.87 582.76,1221.65 U17.3 ; v1(571,1117.85) 601.27,1117.85 C36.2 ; v1(620,1595) 620,1595.31 624.69,1600 630.91,1600 658.31,1627.4 U14.5 677.99,1627.4 685.8,1635.21 685.8,1645.06 713.32,1672.57 735.86,1672.57 C31.2
  Bottom Layer w8: v1@561,1206 v1@563.26,1206 ; v1(570.17,1203.4) 567.56,1206 v1@563.26,1206 ; v1(571,1117.85) 564.58,1117.85 558.11,1124.32 558.11,1196.89 563.26,1202.05 v1@563.26,1206 ; v1(620,1595) 620,1285 580,1245 580,1225 563.26,1208.26 v1@563.26,1206
pads on no net: P1.3

## Polygon pours and split planes (outlines as drawn)
GND on Bottom Layer "top_solder_thermal" (solid, pour order 2): 0,1800.9 0,510.9 185,510.9 235,560.9 470,560.9 515,605.9 590,605.9 590,10.9 1095,10.9 1095,1790.9 1090,1795.9
GND on Top Layer "top_solder_thermal" (solid, pour order 0): 0,1800 0,510 185,510 235,560 470,560 515,605 590,605 590,10 1095,10 1095,1790 1090,1795

## Silkscreen, mask and mechanical layers (free items; w line width, h text height)
Top Overlay:
  text "Audio Out" at 535,11 h40
Bottom Overlay:
  text "CS" at 282,1588 h40
  text "A" at 352,1588 h40
  text "0" at 422,1523 h40
  text "1" at 422,1423 h40
  text "2" at 422,1323 h40
  text "3" at 422,1223 h40
  text "4" at 422,1123 h40
  text "5" at 422,1023 h40
  text "6" at 422,923 h40
  text "+x" at 652,498 h40
  text "-x" at 772,498 h40
  text "A" at 812,423 h40
  text "B" at 812,353 h40
  text "C" at 812,283 h40
  text "Magnetic Controller-Driver / Nicholas Belsten / 1/18/2020 / MIT STARLab / REV. C" at 132,229 h40 r270
Mechanical 4:
  lines w10: 0,0 0,1800 1105,1800 1105,1 1104,0 0,0